# Altium PCB PCB1.PcbDoc
Units mm, origin at the board's own origin, x right, y up, seen from the top; angles counter-clockwise.
Board outline 152.4 x 101.6 mm, 2 copper layers (Top Layer, Bottom Layer); 32 components, 39 nets, 116 pads, 0 vias.
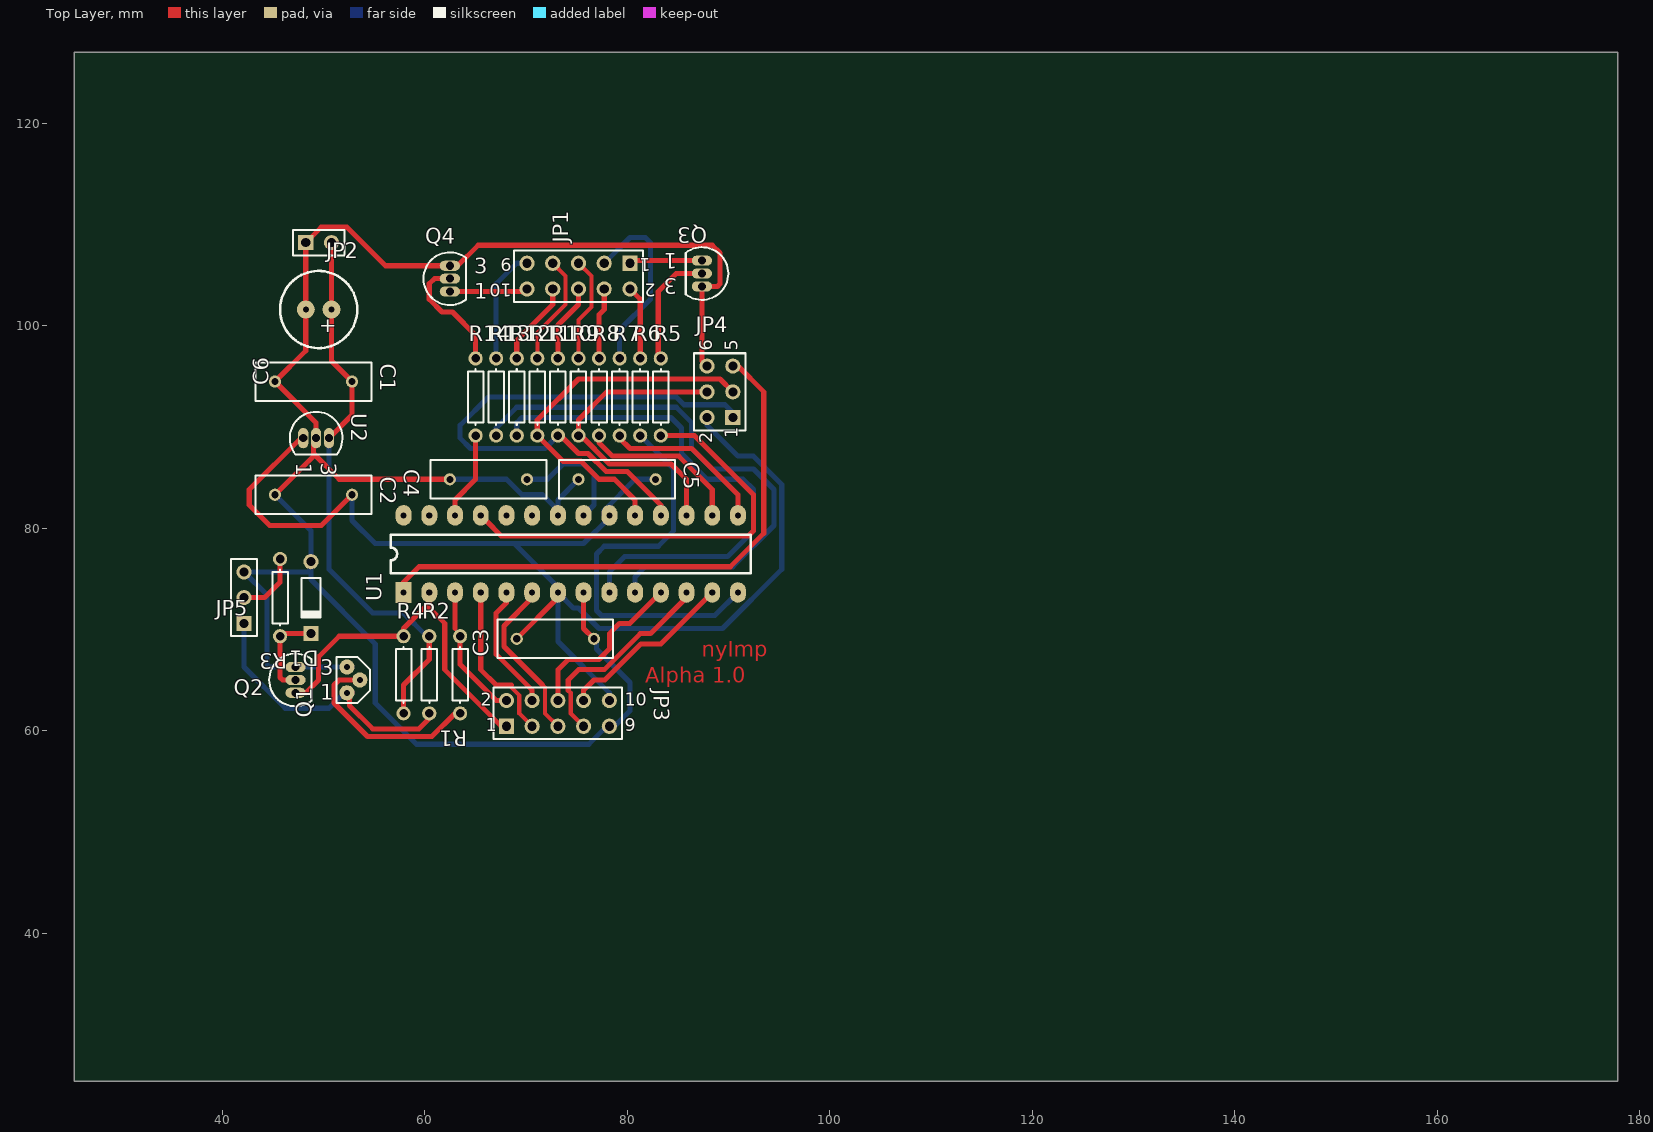
[diagram p0: Top Layer view]
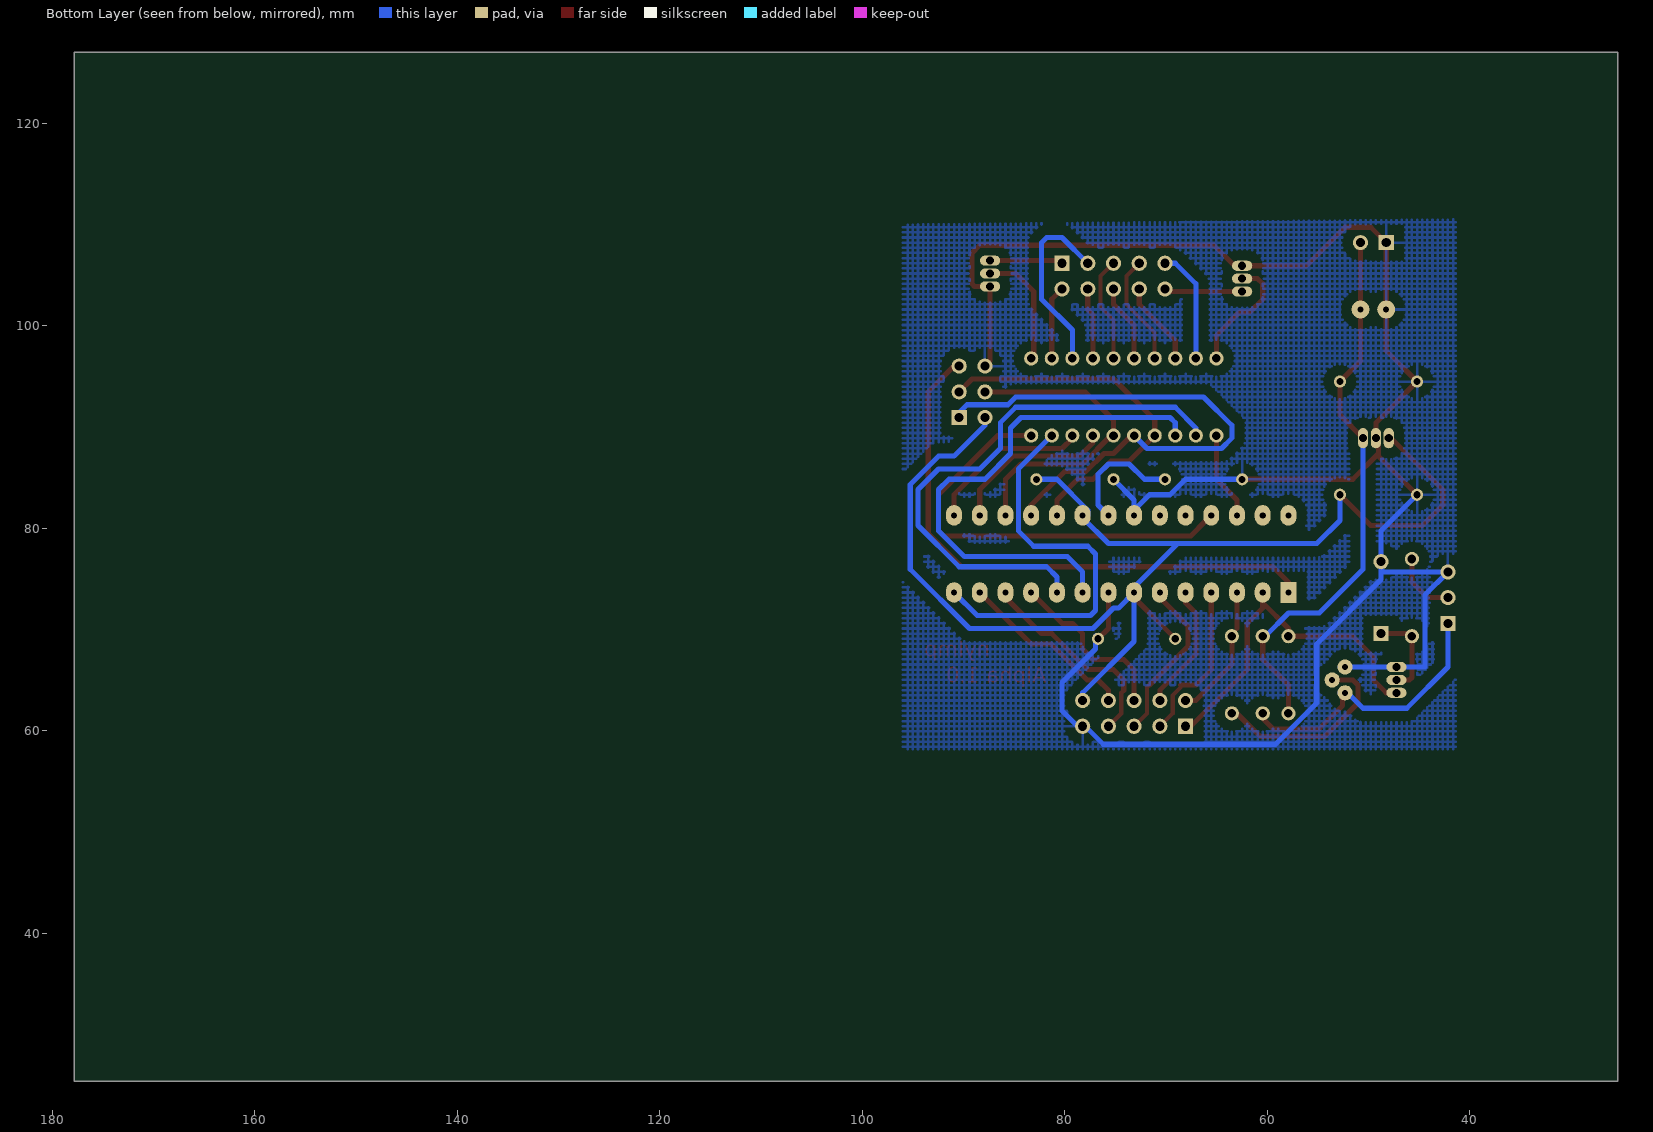
[diagram p1: Bottom Layer view, seen from below]

## Layer stack, top to bottom
Top Layer: signal copper 0.0356
Dielectric: dielectric 0.32, FR-4, Dk 4.8
Bottom Layer: signal copper 0.0356

## Board outline
25.4,25.4 177.8,25.4 177.8,127 25.4,127

## Design rules (kind name [scope] priority, off if disabled: settings)
Clearance [All] p1: gap=0.2
ComponentClearance [All] p1: gap=0.254 collisioncheckmode=0
PolygonConnect [All] p1: connectstyle=Relief reliefconductorwidth=0.254 reliefentries=4 polygonreliefangle="90 Angle"
RoutingLayers [All] p1: top layer=Horizontal bottom layer="Not Used"
RoutingVias [All] p1: holewidth=0.711 width=1.27 viastyle="Through Hole" minholewidth=0.711 minwidth=1.27 maxholewidth=0.711 maxwidth=1.27
SolderMaskExpansion [All] p1: expansion=0.102
TestPointUsage [All] p1: valid=0 allowmultiple=FALSE
Testpoint [All] p1: side=15 testpointundercomponent=TRUE minsize=1.016 maxsize=2.54 preferedsize=1.524 minholesize=0 maxholesize=1.016 preferedholesize=0.813 testpointgrid=0.025 style=1023 order=1234567890
Width [All] p1: maxlimit=0.508 minlimit=0.254 preferedwidth=0.508
16 further rules are at their usual default settings.

## Components (designator, comment, footprint, x,y, rotation, side; value= is the part's Value field where it differs from the comment)
C1 "Cap" RAD-0.3 45.212,94.488 r0 top
C2 "Cap" RAD-0.3 45.212,83.312 r0 top
C3 "Cap" RAD-0.3 76.708,69.088 r180 top
C4 "Cap" RAD-0.3 62.484,84.836 r0 top
C5 "Cap" RAD-0.3 75.184,84.836 r0 top
C6 "Cap Pol1" RB.1/.3 50.8,101.6 r180 top
D1 "1N914" DIO7.1-3.9x1.9 48.768,73.152 r270 top
JP1 "Header 5X2" HDR2X5 80.264,106.172 r180 top
JP2 "Header 2" HDR1X2 48.26,108.204 r0 top
JP3 "Header 5X2" HDR2X5 68.072,60.452 r0 top
JP4 "Header 3X2" HDR2X3 90.424,90.932 r90 top
JP5 "Header 3" HDR1X3 42.164,70.612 r90 top
Q1 "BC547A" TO-92var1 52.324,63.754 r90 top
Q2 "BC547A" BCY-W3/D5.2 47.244,65.024 r0 top
Q3 "BC547A" BCY-W3/D5.2 87.376,105.156 r180 top
Q4 "BC547A" BCY-W3/D5.2 62.484,104.648 r0 top
R1 "Res1" AXIAL-0.3 63.5,65.532 r270 top
R2 "Res1" AXIAL-0.3 60.452,65.532 r90 top
R3 "Res1" AXIAL-0.3 45.72,73.152 r270 top
R4 "Res1" AXIAL-0.3 57.912,65.532 r90 top
R5 "" AXIAL-0.3 83.312,92.964 r90 top
R6 "" AXIAL-0.3 81.28,92.964 r90 top
R7 "" AXIAL-0.3 79.248,92.964 r90 top
R8 "" AXIAL-0.3 77.216,92.964 r90 top
R9 "" AXIAL-0.3 75.184,92.964 r90 top
R10 "" AXIAL-0.3 73.152,92.964 r90 top
R11 "" AXIAL-0.3 71.12,92.964 r90 top
R12 "" AXIAL-0.3 69.088,92.964 r90 top
R13 "" AXIAL-0.3 67.056,92.964 r90 top
R14 "" AXIAL-0.3 65.024,92.964 r90 top
U1 "ATMEGA8_DIP28" DIP-28 57.912,73.66 r90 top
U2 "MC78L05CP" BCY-W3/D5.2 49.276,88.9 r270 top

## Footprints (in the part's own frame and the unit in brackets; to place one, negate y for a bottom-side part, rotate by r counter-clockwise, add the part's x,y. Pads: shape width x height; smd on the part's side, far side on the other; paste and mask are expansions set on the pad)
AXIAL-0.3 [mm]
  round 1.4 hole 0.85: 1(-3.81,0) 2(3.81,0)
  silkscreen extent -2.77,-0.76 2.77,0.76
BCY-W3/D5.2 [mm]
  oval 2x1 hole 0.8: 1(0,-1.27) 2(0,0) 3(0,1.27)
  silkscreen extent -2.6,-2.6 1.6,2.6
DIO7.1-3.9x1.9 [mm]
  round 1.5 hole 0.9: 1(-3.55,0)
  rect 1.5x1.5 hole 0.9: 2(3.55,0)
  silkscreen extent -1.95,-0.95 2.05,0.95
DIP-28 [mil]
  rect 80x62 hole 23.62: 1(0,0)
  oval 80x62 hole 23.62: 2(0,-100) 3(0,-200) 4(0,-300) 5(0,-400) 6(0,-500) 7(0,-600) 8(0,-700) 9(0,-800) 10(0,-900) 11(0,-1000) 12(0,-1100) 13(0,-1200) 14(0,-1300) 15(300,-1300) 16(300,-1200) 17(300,-1100) 18(300,-1000) 19(300,-900) 20(300,-800) 21(300,-700) 22(300,-600) 23(300,-500) 24(300,-400) 25(300,-300) 26(300,-200) 27(300,-100) 28(300,0)
  silkscreen extent 75,-1350 225,50
HDR1X2 [mm]
  rect 1.5x1.5 hole 0.9: 1(0,0)
  round 1.5 hole 0.9: 2(2.54,0)
  silkscreen extent -1.27,-1.27 3.81,1.27
HDR1X3 [mm]
  rect 1.5x1.5 hole 0.9: 1(0,0)
  round 1.5 hole 0.9: 2(2.54,0) 3(5.08,0)
  silkscreen extent -1.27,-1.27 6.35,1.27
HDR2X3 [mm]
  rect 1.5x1.5 hole 0.9: 1(0,0)
  round 1.5 hole 0.9: 2(0,2.54) 3(2.54,0) 4(2.54,2.54) 5(5.08,0) 6(5.08,2.54)
  silkscreen extent -1.27,-1.27 6.35,3.81
HDR2X5 [mm]
  rect 1.5x1.5 hole 0.9: 1(0,0)
  round 1.5 hole 0.9: 2(0,2.54) 3(2.54,0) 4(2.54,2.54) 5(5.08,0) 6(5.08,2.54) 7(7.62,0) 8(7.62,2.54) 9(10.16,0) 10(10.16,2.54)
  silkscreen extent -1.27,-1.27 11.43,3.81
RAD-0.3 [mm]
  round 1.2 hole 0.7: 1(0,0) 2(7.62,0)
  silkscreen extent -1.91,-1.91 9.53,1.91
RB.1/.3 [mil]
  round 70 hole 23.62: 1(0,0) 2(100,0)
  silkscreen extent -100,-150 200,150
TO-92var1 [mm]
  round 1.5 hole 0.6: 1(0,0) 2(1.27,-1.27) 3(2.54,0)
  silkscreen extent -1.02,-2.29 3.56,1.02

## Part data
C1 C2 C3 C4 C5: "Capacitor"
C6: "Polarized Capacitor (Radial)"
D1: "High Conductance Fast Diode"
JP1 JP3: "Header, 5-Pin, Dual row"
JP2: "Header, 2-Pin"
JP4: "Header, 3-Pin, Dual row"
JP5: "Header, 3-Pin"
Q1 Q2 Q3 Q4: "Amplifier Transistor NPN Silicon"
R1 R2 R3 R4: "Resistor"
R5 R6 R7 R8 R9 R10 R11 R12 R13 R14: library part Res1, "Resistor"
U1: "Atmel Microcontroller - Library created by carel..  <www.mpfreezone.com>"
U2: "3-Terminal Low-Current Positive Fixed Voltage Regulator"

## Nets (pads, with @x,y where several pads share a name; then routed paths per layer and width w, separated by ;. In a path a pad name is that pad's centre, name@x,y a point inside that pad or via, vN(x,y) a via of type N, cw(c..) or ccw(c..) an arc to the next point about the centre after c; other vN are vias at no path point)
9V: C1.2 C6.1 JP2.2 R2.2 R4.1 U2.3 | length 55.4
  Top Layer w0.508: U2.3 52.832,91.186 C1.2 50.8,96.52 C6.1 JP2.2 ; R4.1 57.912,64.516 60.452,67.056 R2.2
  Bottom Layer w0.508: U2.3 50.546,75.946 54.864,71.628 57.912,71.628 60.198,69.342 R2.2
GND: C1.1 C2.1 C3.1 C4.1 C5.1 C6.2 D1.1 JP2.1 JP3.9 JP4.6 JP5.3 Q1.3 Q2.3 Q3.3 Q4.3 U1.8 U1.22 U2.2 | length 209.7
  Top Layer w0.508: C2.1 49.014,87.114 49.014,88.638 U2.2 49.276,90.424 C1.1 48.26,97.536 C6.2 JP2.1 49.784,109.728 52.324,109.728 56.134,105.918 63.246,105.918 65.278,107.95 88.392,107.95 89.154,107.188 89.154,104.14 88.9,103.886 Q3.3 87.376,96.52 JP4.6 ; 49.014,87.376 51.554,84.836 C4.1 ; U1.8 75.692,70.104 C3.1
  Bottom Layer w0.508: C2.1 48.768,79.756 48.768,74.93 55.118,68.58 55.118,62.738 59.182,58.674 76.2,58.674 77.978,60.452 78.74,60.452 80.264,61.976 80.264,64.77 76.962,68.072 C3.1@76.962,69.342 ; 48.768,75.946 48.514,75.692 JP5.3 44.444,73.412 44.444,66.294 Q1.3@52.832,66.294 ; C4.1 68.072,84.836 69.596,83.312 71.628,83.312 U1.22@73.152,81.788 ; U1.22 U1.22@73.152,81.788 ; C5.1 73.152,82.804 U1.22@73.152,81.788
NetC4_2: C4.2 U1.21 | length 12.1
  Bottom Layer w0.508: C4.2 72.136,84.836 73.66,86.36 75.692,86.36 76.708,85.344 76.708,82.296 U1.21
NetD1_2: D1.2 Q2.2 R3.2 | length 8.8
  Top Layer w0.508: Q2.2 45.974,65.024 45.72,65.278 R3.2 45.98,69.602 D1.2
NetJP1_1: JP1.1 Q3.1 | length 7.2
  Top Layer w0.508: JP1.1 80.518,106.426 Q3.1
NetJP1_2: JP1.2 R6.2 | length 7.3
  Top Layer w0.508: JP1.2 81.28,102.616 R6.2
NetJP1_3: JP1.3 R7.2 | length 18.5
  Bottom Layer w0.508: JP1.3 80.264,108.712 81.788,108.712 82.296,108.204 82.296,102.616 79.248,99.568 R7.2
NetJP1_4: JP1.4 R8.2 | length 7.3
  Top Layer w0.508: R8.2@77.216,96.52 77.216,101.092 77.724,101.6 JP1.4
NetJP1_5: JP1.5 R9.2 | length 10.5
  Top Layer w0.408: R9.2 75.184,100.584 76.454,101.854 76.454,104.902 JP1.5
NetJP1_6: JP1.6 R10.2 | length 7.7
  Top Layer w0.508: R10.2 73.152,100.076 75.184,102.108 JP1.6
NetJP1_7: JP1.7 R11.2 | length 11.1
  Top Layer w0.408: R11.2 71.12,99.314 73.914,102.108 73.914,104.902 JP1.7
NetJP1_8: JP1.8 R12.2 | length 8.3
  Top Layer w0.508: R12.2 69.088,98.552 72.644,102.108 JP1.8
NetJP1_9: JP1.9 R13.2 | length 11.3
  Bottom Layer w0.508: R13.2 67.056,104.14 69.088,106.172 JP1.9
NetJP1_10: JP1.10 Q4.1 | length 7.7
  Top Layer w0.508: Q4.1 69.85,103.378 JP1.10
NetJP3_1: JP3.1 Q2.1 R4.2 U1.2 | length 35.3
  Top Layer w0.508: Q2.1 48.26,63.754 49.53,65.024 49.53,67.31 51.562,69.342 R4.2@57.404,69.342 ; R4.2 57.912,70.104 60.452,72.644 U1.2 ; U1.2@60.452,73.152 60.452,72.136 61.976,70.612 61.976,66.04 67.564,60.452 JP3.1
NetJP3_2: JP3.2 R1.1 U1.3 | length 12.4
  Top Layer w0.508: 62.992,70.104 U1.3 ; R1.1 63.5,66.548 67.056,62.992 JP3.2
NetJP3_3: JP3.3 U1.4 | length 15.8
  Top Layer w0.408: 68.58,64.516 68.58,64.262 69.342,63.5 69.342,61.722 JP3.3@70.358,60.706
  Top Layer w0.508: U1.4 65.532,66.04 67.056,64.516 68.58,64.516
NetJP3_4: JP3.4 U1.5 | length 12.6
  Top Layer w0.508: U1.5 68.072,72.644 67.056,71.628 67.056,67.564 70.612,64.008 JP3.4
NetJP3_5: JP3.5 U1.6 | length 16.6
  Top Layer w0.408: 71.628,64.516 71.882,64.262 71.882,61.722 JP3.5
  Top Layer w0.508: U1.6 70.612,73.152 67.818,70.358 67.818,68.326 71.628,64.516
NetJP3_6: JP3.6 U1.11 | length 17.8
  Top Layer w0.508: JP3.6@73.152,62.484 73.152,66.04 74.168,67.056 77.216,67.056 78.232,68.072 78.232,69.596 79.248,70.612 80.264,70.612 U1.11
NetJP3_7: JP3.7 U1.12 | length 21.3
  Top Layer w0.408: 74.168,64.008 74.422,63.754 74.422,61.722 JP3.7
  Top Layer w0.508: 74.168,64.008 74.168,65.024 75.184,66.04 77.724,66.04 81.28,69.596 82.296,69.596 85.852,73.152 U1.12 U1.12@85.344,73.66
NetJP3_8: JP3.8 U1.13 | length 17.7
  Top Layer w0.508: JP3.8 75.692,64.008 76.708,65.024 77.786,65.024 81.342,68.58 83.312,68.58 U1.13
NetJP4_1: JP4.1 R10.1 U1.18 | length 55.1
  Top Layer w0.508: R10.1 73.406,89.154 75.184,87.376 76.138,87.376 77.916,85.598 80.01,85.598 83.312,82.296 U1.18
  Bottom Layer w0.508: R10.1 71.882,87.884 64.516,87.884 63.5,88.9 63.5,90.17 66.294,92.964 84.836,92.964 85.598,92.202 89.662,92.202 90.424,91.44 JP4.1
NetJP4_3: JP4.3 R11.1 U1.19 | length 36.8
  Top Layer w0.508: U1.19 80.772,82.804 78.74,84.836 77.216,84.836 75.438,86.614 73.66,86.614 R11.1 71.12,90.678 75.184,94.742 89.154,94.742 JP4.3
NetJP4_4: JP4.4 R9.1 U1.17 | length 31.4
  Top Layer w0.508: U1.17 85.852,84.836 84.328,86.36 78.232,86.36 75.438,89.154 R9.1 75.184,90.678 77.978,93.472 JP4.4
NetJP4_5: JP4.5 U1.1 | length 56.6
  Top Layer w0.508: U1.1 57.912,74.676 59.436,76.2 90.17,76.2 93.472,79.502 93.472,93.472 90.932,96.012 JP4.5
NetJP5_1: JP5.1 Q1.1 R2.1 | length 28.4
  Top Layer w0.508: Q1.1@52.832,63.754 52.578,63.5 52.578,62.484 54.864,60.198 59.436,60.198 60.452,61.214 R2.1
  Bottom Layer w0.508: JP5.1 42.164,66.294 46.228,62.23 50.546,62.23 52.07,63.754 Q1.1@52.832,63.754
NetJP5_2: JP5.2 R3.1 | length 6.5
  Top Layer w0.508: JP5.2 44.196,73.152 45.72,74.676 R3.1
NetQ1_2: Q1.2 R1.2 | length 18.5
  Top Layer w0.508: 52.832,65.024 51.562,65.024 51.054,64.516 51.054,62.738 54.356,59.436 60.706,59.436 62.992,61.722 R1.2
NetQ3_2: Q3.2 R5.2 | length 11.7
  Top Layer w0.508: R5.2@83.058,96.774 83.058,103.378 84.836,105.156 Q3.2
NetQ4_2: Q4.2 R14.2 | length 12.1
  Top Layer w0.508: Q4.2 60.96,104.648 60.452,104.14 60.452,102.616 61.722,101.346 62.738,101.346 65.024,99.06 R14.2
NetR5_1: R5.1 U1.25 | length 42.4
  Top Layer w0.508: U1.25@66.04,80.772 67.564,79.248 91.948,79.248 92.456,79.756 92.456,83.312 86.614,89.154 R5.1
NetR6_1: R6.1 U1.14 | length 40
  Bottom Layer w0.508: R6.1 84.582,85.852 84.582,79.756 83.058,78.232 77.724,78.232 76.962,77.47 76.962,71.882 77.47,71.374 88.646,71.374 U1.14
NetR7_1: R7.1 U1.15 | length 16.3
  Top Layer w0.508: R7.1 79.248,88.9 80.264,87.884 86.36,87.884 90.932,83.312 U1.15
NetR8_1: R8.1 U1.16 | length 16.3
  Top Layer w0.508: R8.1 77.216,88.454 78.548,87.122 85.09,87.122 88.392,83.82 U1.16
NetR12_1: R12.1 U1.9 | length 51.3
  Bottom Layer w0.508: R12.1 69.088,90.424 69.596,90.932 84.328,90.932 85.344,89.916 85.344,87.376 87.884,84.836 91.44,84.836 92.456,83.82 92.456,79.756 89.916,77.216 79.756,77.216 78.232,75.692 U1.9
NetR13_1: R13.1 U1.10 | length 54.8
  Bottom Layer w0.508: R13.1 67.056,89.916 69.088,91.948 84.836,91.948 86.36,90.424 86.36,87.884 88.392,85.852 92.456,85.852 94.488,83.82 94.488,80.264 90.424,76.2 81.788,76.2 80.772,75.184 U1.10
NetR14_1: R14.1 U1.26 | length 9
  Top Layer w0.508: U1.26 62.992,82.804 65.024,84.836 R14.1 R14.1@64.834,88.964
VCC: C2.2 C3.2 C5.2 JP3.10 JP4.2 U1.7 U1.20 U2.1 | length 129.3
  Top Layer w0.508: U2.1 47.752,88.9 42.672,83.82 42.672,82.296 44.704,80.264 49.784,80.264 C2.2 ; C3.2 73.152,73.152 U1.7
  Bottom Layer w0.508: C2.2 52.832,80.772 55.118,78.486 75.692,78.486 78.232,81.026 U1.20 77.724,81.28 77.724,81.788 80.772,84.836 C5.2 ; 68.834,78.486 73.152,74.168 73.152,68.834 78.232,63.754 JP3.10 ; U1.7 74.676,72.136 75.184,72.136 77.216,70.104 89.408,70.104 95.25,75.946 95.25,84.328 92.456,87.122 90.932,87.122 87.884,90.17 JP4.2
pads on no net: U1.23 U1.24 U1.27 U1.28

## Polygon pours and split planes (outlines as drawn)
GND on Bottom Layer (hatched 90Degree grid 0.508 track 0.254): 41.402,110.49 41.402,58.166 96.012,58.166 96.012,109.982

## Other copper
Top Layer:
  text "nyImp" at 87.376,67.31 h1.52
  text "Alpha 1.0" at 81.788,64.77 h1.52

## Silkscreen, mask and mechanical layers (free items; w line width, h text height)
Mechanical 1:
  lines w0.254: 39.878,57.912 39.878,110.236 95.504,110.236 96.012,109.728 96.012,57.658 95.758,57.404 77.978,57.404 40.386,57.404 39.878,57.912

## Text inside footprints (layer, text, board x,y; h text height)
C6: Top Overlay "+" at 51.308,100.584 h1.52 r180
JP1: Top Overlay "2" at 82.804,104.14 h1.27 r180; Top Overlay "1" at 82.296,106.68 h1.27 r180; Top Overlay "9" at 68.58,106.68 h1.27 r180; Top Overlay "10" at 68.58,104.14 h1.27 r180
JP3: Top Overlay "10" at 79.756,62.484 h1.27; Top Overlay "9" at 79.756,59.944 h1.27; Top Overlay "1" at 66.04,59.944 h1.27; Top Overlay "2" at 65.532,62.484 h1.27
JP4: Top Overlay "1" at 90.932,88.9 h1.27 r90; Top Overlay "2" at 88.392,88.392 h1.27 r90; Top Overlay "5" at 90.932,97.536 h1.27 r90; Top Overlay "6" at 88.392,97.536 h1.27 r90
Q2: Top Overlay "3" at 49.665,65.491 h1.5; Top Overlay "1" at 49.665,63.045 h1.5
Q3: Top Overlay "3" at 84.955,104.689 h1.5 r180; Top Overlay "1" at 84.955,107.135 h1.5 r180
Q4: Top Overlay "1" at 64.905,102.669 h1.5; Top Overlay "3" at 64.905,105.115 h1.5
U2: Top Overlay "3" at 49.743,86.479 h1.5 r270; Top Overlay "1" at 47.297,86.479 h1.5 r270